# Altium PCB BEE-PC_EXP_V100.PcbDoc (part 2 of 7)
Units mm, origin at the board's own origin, x right, y up, seen from the top; angles counter-clockwise.
Board outline 180 x 79.98 mm, 6 copper layers (L1 TOP, L2 GND 1, L3 SIGNAL, L4 PWR, L5 GND 2, L6 BOT), stack 1.536 mm thick; 1146 components, 909 nets, 3933 pads, 1234 vias.
Unrouted connection lines stored in the file: 1783.
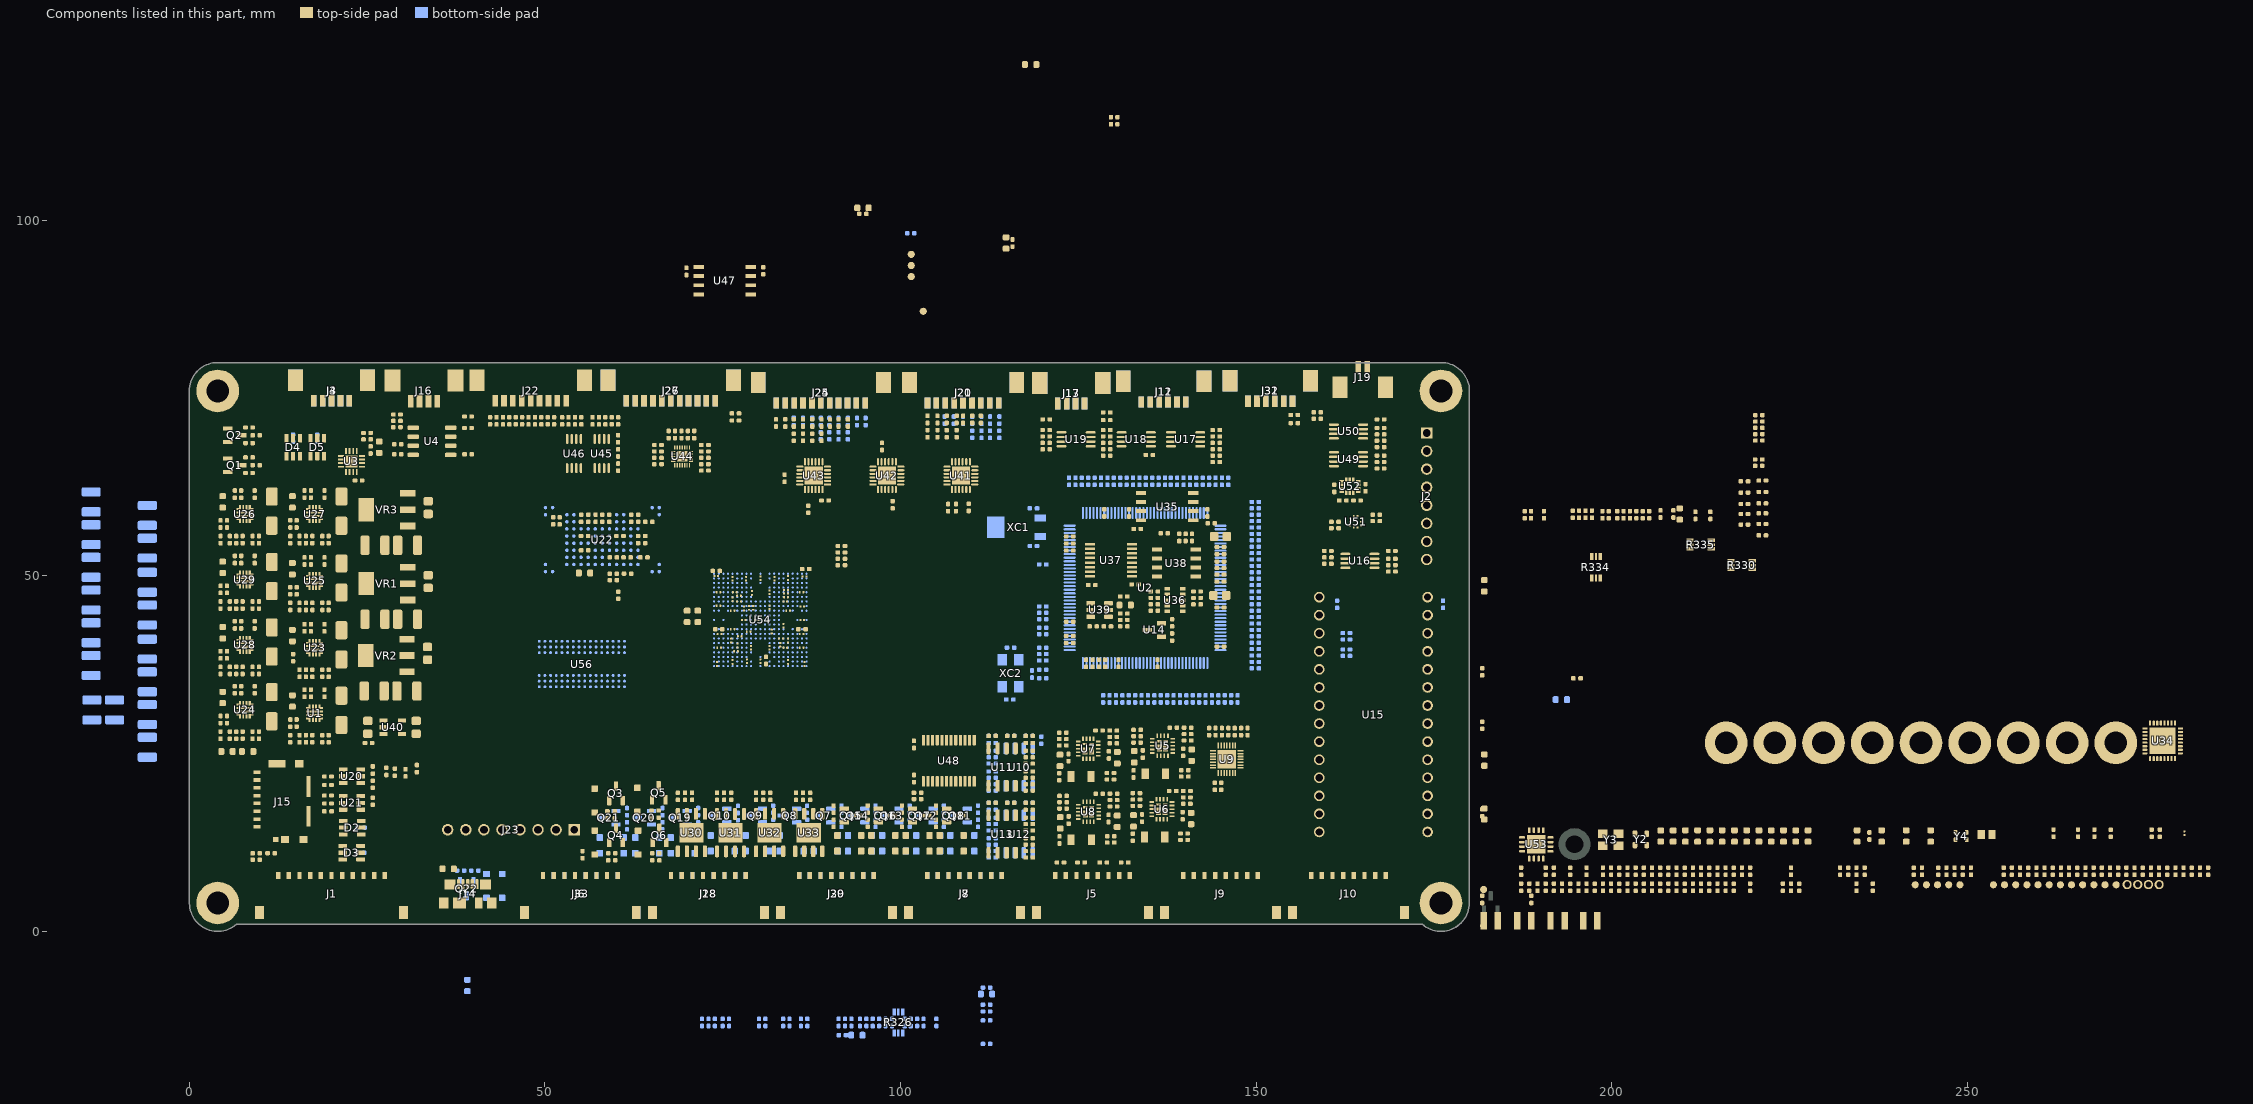
[diagram p3: the components of this part, seen from the top]

## Components (designator, comment, footprint, x,y, rotation, side; value= is the part's Value field where it differs from the comment) (continued)
R68 "22R" RES_C_1005X40 144.7,32.7 r270 bottom
R69 "22R" RES_C_1005X40 140.2,32.7 r270 bottom
R70 "22R" RES_C_1005X40 137.5,32.7 r270 bottom
R71 "22R" RES_C_1005X40 135.7,32.7 r270 bottom
R72 "22R" RES_C_1005X40 134.8,32.7 r270 bottom
R73 "22R" RES_C_1005X40 133.9,32.7 r90 bottom
R74 "22R" RES_C_1005X40 130.3,32.7 r270 bottom
R75 "22R" RES_C_1005X40 136.6,32.7 r90 bottom
R76 "22R" RES_C_1005X40 120,44.8 r180 bottom
R77 "22R" RES_C_1005X40 120,43.9 r180 bottom
R78 "22R" RES_C_1005X40 149.9,56.8 r0 bottom
R79 "10k" RES_C_1005X40 137.1,56 r180 top
R80 "10k" RES_C_1005X40 120.003,45.7 r180 bottom
R81 "22R" RES_C_1005X40 158.6,72.1 r180 top
R82 "10M" RES_C_1005X40 118.5,36.2 r270 bottom
R83 "5.62k" RES_C_1005X40 127,37.7 r270 top
R84 "10k" RES_C_1005X40 23.8,63.4 r180 top
R85 "10k" RES_C_1005X40 8.4,64.464 r0 top
R86 "10k" RES_C_1005X40 9.4,65.564 r180 top
R87 "100R" RES_C_1005X40 8.4,66.664 r0 top
R88 "10k" RES_C_1005X40 25,69.2 r0 top
R89 "10k" RES_C_1005X40 25,70.1 r0 top
R90 "10k" RES_C_1005X40 8.4,68.664 r0 top
R91 "10k" RES_C_1005X40 9.4,69.764 r180 top
R92 "100R" RES_C_1005X40 8.4,70.864 r0 top
R93 "DNP/0R" RES_C_1005X40 29.2,70.9 r180 top
R94 "DNP/0R" RES_C_1005X40 29.3,67.1 r180 top
R95 "10k" RES_C_1005X40 39.2,70.8 r0 top
R96 "10k" RES_C_1005X40 39.2,67.1 r0 top
R97 "10k" RES_C_1005X40 138.375,28.65 r180 top
R98 "10k" RES_C_1005X40 138.275,19.75 r180 top
R99 "22R" RES_C_1005X40 140.375,26.85 r180 top
R100 "22R" RES_C_1005X40 140.275,17.95 r180 top
R101 "4.7k" RES_C_1005X40 167.5,66 r180 top
R102 "4.7k" RES_C_1005X40 167.5,66.9 r180 top
R103 "10k" RES_C_1005X40 140.375,27.75 r0 top
R104 "22R" RES_C_1005X40 133.275,28.35 r180 top
R105 "10k" RES_C_1005X40 140.275,18.85 r0 top
R106 "22R" RES_C_1005X40 133.175,19.45 r180 top
R107 "10k" RES_C_1005X40 127.925,28.25 r180 top
R108 "10k" RES_C_1005X40 127.961,19.368 r180 top
R109 "22R" RES_C_1005X40 129.925,26.45 r180 top
R110 "22R" RES_C_1005X40 129.961,17.568 r180 top
R111 "10k" RES_C_1005X40 167.5,65.1 r0 top
R112 "22R" RES_C_1005X40 158.6,73 r0 top
R113 "10k" RES_C_1005X40 129.925,27.35 r0 top
R114 "22R" RES_C_1005X40 122.825,27.95 r180 top
R115 "10k" RES_C_1005X40 129.961,18.468 r0 top
R116 "22R" RES_C_1005X40 122.861,19.068 r180 top
R117 "10k" RES_C_1005X40 145.2,28.1 r90 top
R118 "10k" RES_C_1005X40 147,28.1 r90 top
R119 "10k" RES_C_1005X40 147.9,28.1 r270 top
R120 "10k" RES_C_1005X40 144.3,28.1 r270 top
R121 "10k" RES_C_1005X40 148.8,28.1 r270 top
R122 "10k" RES_C_1005X40 143.4,28.1 r270 top
R123 "22R" RES_C_1005X40 144.2,20.4 r90 top
R124 "22R" RES_C_1005X40 145.1,20.4 r90 top
R125 "120R" RES_C_1005X40 59.3,15.9 r180 top
R126 "10k" RES_C_1005X40 59.3,16.9 r180 top
R127 "120R" RES_C_1005X40 59.4,10 r180 top
R128 "10k" RES_C_1005X40 59.4,11 r180 top
R129 "120R" RES_C_1005X40 65.5,16 r180 top
R130 "10k" RES_C_1005X40 65.5,17 r180 top
R131 "120R" RES_C_1005X40 65.6,10 r180 top
R132 "10k" RES_C_1005X40 65.6,11 r180 top
R133 "22R" RES_C_1005X40 112.9,19.8 r0 bottom
R134 "22R" RES_C_1005X40 118.1,19.8 r180 top
R135 "22R" RES_C_1005X40 112.9,22.5 r180 bottom
R136 "22R" RES_C_1005X40 118.1,22.5 r0 top
R137 "10k" RES_C_1005X40 112.9,21.6 r0 bottom
R138 "10k" RES_C_1005X40 118.1,21.6 r180 top
R139 "22R" RES_C_1005X40 115.5,27.5 r180 bottom
R140 "22R" RES_C_1005X40 115.5,27.5 r0 top
R141 "22R" RES_C_1005X40 112.9,25.4 r180 bottom
R142 "22R" RES_C_1005X40 118.1,25.4 r0 top
R143 "10k" RES_C_1005X40 112.9,24.5 r0 bottom
R144 "10k" RES_C_1005X40 118.1,24.5 r180 top
R145 "22R" RES_C_1005X40 112.9,10.4 r0 bottom
R146 "22R" RES_C_1005X40 118.1,10.4 r180 top
R147 "22R" RES_C_1005X40 112.9,13.1 r180 bottom
R148 "22R" RES_C_1005X40 118.1,13.1 r0 top
R149 "10k" RES_C_1005X40 112.9,12.2 r0 bottom
R150 "10k" RES_C_1005X40 118.1,12.2 r180 top
R151 "22R" RES_C_1005X40 115.5,18.1 r180 bottom
R152 "22R" RES_C_1005X40 115.5,18.1 r0 top
R153 "22R" RES_C_1005X40 112.9,16 r180 bottom
R154 "22R" RES_C_1005X40 118.1,16 r0 top
R155 "10k" RES_C_1005X40 112.9,15.1 r0 bottom
R156 "10k" RES_C_1005X40 118.1,15.1 r180 top
R157 "22R" RES_C_1005X40 138.2,43.4 r90 top
R158 "DNP/4.7k" RES_C_1005X40 162.712,41.05 r180 bottom
R159 "DNP/4.7k" RES_C_1005X40 162.712,41.95 r180 bottom
R160 "DNP/4.7k" RES_C_1005X40 162.712,39.65 r180 bottom
R161 "DNP/4.7k" RES_C_1005X40 162.712,38.75 r180 bottom
R162 "4.7k" RES_C_1005X40 160.1,52.6 r0 top
R163 "4.7k" RES_C_1005X40 160.1,51.7 r0 top
R164 "4.7k" RES_C_1005X40 169.1,52.4 r180 top
R165 "4.7k" RES_C_1005X40 169.1,51.5 r180 top
R166 "1k" RES_C_1005X40 149.9,50.5 r180 bottom
R167 "0R" RES_C_1608X60 192.925,32.6 r0 bottom
R168 "10k" RES_C_1005X40 169.1,50.6 r0 top
R169 "22R" RES_C_1005X40 137.2,63.3 r270 bottom
R170 "4.7k" RES_C_1005X40 144.4,69.6 r180 top
R171 "4.7k" RES_C_1005X40 144.4,68.7 r180 top
R172 "4.7k" RES_C_1005X40 144.4,66.9 r180 top
R173 "4.7k" RES_C_1005X40 144.4,66 r180 top
R174 "10k" RES_C_1005X40 106.7,59.6 r90 top
R175 "10k" RES_C_1005X40 83.7,63.725 r90 top
R176 "22R" RES_C_1005X40 65.9,65.7 r180 top
R177 "22R" RES_C_1005X40 65.9,67.5 r180 top
R178 "10k" RES_C_1005X40 144.4,70.5 r0 top
R179 "22R" RES_C_1005X40 135.4,63.3 r270 bottom
R180 "4.7k" RES_C_1005X40 129,69.6 r0 top
R181 "4.7k" RES_C_1005X40 129,68.7 r0 top
R182 "10k" RES_C_1005X40 129,70.5 r180 top
R183 "4.7k" RES_C_1005X40 120.482,68.7 r0 top
R184 "4.7k" RES_C_1005X40 120.482,69.6 r0 top
R185 "22R" RES_C_1005X40 138.4,32.7 r90 bottom
R186 "22R" RES_C_1005X40 142.9,32.7 r90 bottom
R187 "22R" RES_C_1005X40 67.4,69.875 r90 top
R188 "4.7k" RES_C_1005X40 60.3,71.8 r90 top
R189 "4.7k" RES_C_1005X40 58.5,71.8 r90 top
R190 "10k" RES_C_1005X40 120.482,70.5 r180 top
R191 "DNP/10k" RES_C_1005X40 19.5,20.6 r180 top
R192 "DNP/10k" RES_C_1005X40 25.8,20.7 r90 top
R193 "DNP/10k" RES_C_1005X40 25.8,18.3 r270 top
R194 "DNP/10k" RES_C_1005X40 19.5,19.1 r180 top
R195 "DNP/10k" RES_C_1005X40 25.8,22.7 r270 top
R196 "DNP/10k" RES_C_1005X40 19.5,16.9 r180 top
R197 "10k" RES_C_1005X40 11.5,11 r0 top
R198 "10k" RES_C_1005X40 59.624,50.3 r0 top
R199 "10k" RES_C_1005X40 61.624,50.3 r180 top
R200 "10k" RES_C_1005X40 59.624,52.6 r0 top
R201 "10k" RES_C_1005X40 61.561,52.6 r180 top
R202 "10k" RES_C_1005X40 62.624,57.6 r0 top
R203 "10k" RES_C_1005X40 58.561,57.6 r180 top
R204 "10k" RES_C_1005X40 62.624,58.6 r0 top
R205 "10k" RES_C_1005X40 58.561,58.6 r180 top
R206 "10k" RES_C_1005X40 63.611,55.6 r0 top
R207 "10k" RES_C_1005X40 63.611,54.6 r0 top
R208 "10k" RES_C_1005X40 60.561,55.6 r180 top
R209 "10k" RES_C_1005X40 29.2,72.7 r180 top
R210 "10k" RES_C_1005X40 29.2,71.8 r180 top
R211 "22R" RES_C_1005X40 69.2,69.875 r90 top
R212 "22R" RES_C_1005X40 72.5,68.4 r0 top
R213 "10k" RES_C_1005X40 129.001,72.975 r0 top
R214 "10k" RES_C_1005X40 129,71.9 r0 top
R215 "22R" RES_C_1005X40 72.5,66.6 r0 top
R216 "22R" RES_C_1005X40 65.9,66.6 r180 top
R217 "470k" RES_C_1005X40 16.4,36.3 r270 top
R218 "47k" RES_C_1005X40 18.7,36.3 r270 top locked
R219 "47k" RES_C_1005X40 19.6,36.3 r270 top
R220 "470k" RES_C_1005X40 15.5,36.3 r90 top
R221 "133k" RES_C_1005X40 17.3,36.3 r90 top
R222 "470k" RES_C_1005X40 5.3,29.8 r90 top
R223 "47k" RES_C_1005X40 8.9,27.6 r270 top
R224 "47k" RES_C_1005X40 9.8,27.6 r270 top
R225 "22R" RES_C_1005X40 6.6,27.6 r270 top
R226 "1.6k" RES_C_1005X40 17.1,42.7 r270 top
R227 "DNP/10k" RES_C_1005X40 5.7,27.6 r270 top
R228 "47k" RES_C_1005X40 4.4,27.6 r270 top
R229 "10k" RES_C_1005X40 7.5,27.6 r270 top
R230 "1.6k" RES_C_1005X40 7.3,34 r270 top
R231 "470k" RES_C_1005X40 15.1,47.9 r90 top
R232 "470k" RES_C_1005X40 5.3,57.3 r90 top
R233 "47k" RES_C_1005X40 18.7,45.7 r270 top
R234 "47k" RES_C_1005X40 19.6,45.7 r270 top
R235 "47k" RES_C_1005X40 8.9,55.1 r270 top
R236 "47k" RES_C_1005X40 9.8,55.1 r270 top
R237 "22R" RES_C_1005X40 16.4,45.7 r270 top
R238 "22R" RES_C_1005X40 6.6,55.1 r270 top
R239 "DNP/10k" RES_C_1005X40 15.5,45.7 r270 top
R240 "DNP/10k" RES_C_1005X40 5.7,55.1 r270 top
R241 "133k" RES_C_1005X40 14.2,45.7 r270 top
R242 "47k" RES_C_1005X40 4.4,55.1 r270 top
R243 "10k" RES_C_1005X40 17.3,45.7 r270 top
R244 "10k" RES_C_1005X40 7.5,55.1 r270 top
R245 "1.6k" RES_C_1005X40 17.1,52.1 r270 top
R246 "1.6k" RES_C_1005X40 7.3,61.5 r270 top
R247 "470k" RES_C_1005X40 15.1,57.3 r90 top
R248 "47k" RES_C_1005X40 18.7,55.1 r270 top
R249 "47k" RES_C_1005X40 19.6,55.1 r270 top
R250 "22R" RES_C_1005X40 16.4,55.1 r270 top
R251 "DNP/10k" RES_C_1005X40 15.5,55.1 r270 top
R252 "DNP/10k" RES_C_1005X40 6.6,36.7 r270 top
R253 "470k" RES_C_1005X40 5.3,38.9 r90 top
R254 "47k" RES_C_1005X40 14.2,55.1 r270 top
R255 "10k" RES_C_1005X40 17.3,55.1 r270 top
R256 "47k" RES_C_1005X40 8.9,36.7 r270 top
R257 "47k" RES_C_1005X40 9.8,36.7 r270 top
R258 "22R" RES_C_1005X40 5.7,36.7 r270 top
R259 "10k" RES_C_1005X40 7.5,36.7 r270 top
R260 "133k" RES_C_1005X40 4.4,36.7 r270 top
R261 "1.6k" RES_C_1005X40 17.1,61.5 r270 top
R262 "1.6k" RES_C_1005X40 7.3,43.1 r270 top
R263 "DNP/10k" RES_C_1005X40 6.6,45.9 r270 top
R264 "470k" RES_C_1005X40 5.3,48.1 r90 top
R265 "47k" RES_C_1005X40 8.9,45.9 r270 top
R266 "47k" RES_C_1005X40 9.8,45.9 r270 top
R267 "22R" RES_C_1005X40 5.7,45.9 r270 top
R268 "10k" RES_C_1005X40 7.5,45.9 r270 top
R269 "133k" RES_C_1005X40 4.4,45.9 r270 top
R270 "1.6k" RES_C_1005X40 7.3,52.3 r270 top
R271 "10k" RES_C_1005X40 68.7,19 r270 top
R272 "10k" RES_C_1005X40 69.7,19 r90 top
R273 "DNP/10k" RES_C_1005X40 70.7,19 r90 top
R274 "10k" RES_C_1005X40 74.2,19 r270 top
R275 "10k" RES_C_1005X40 75.2,19 r90 top
R276 "DNP/10k" RES_C_1005X40 76.2,19 r90 top
R277 "10k" RES_C_1005X40 79.7,19 r270 top
R278 "10k" RES_C_1005X40 80.7,19 r90 top
R279 "DNP/10k" RES_C_1005X40 81.7,19 r90 top
R280 "10k" RES_C_1005X40 85.3,19 r270 top
R281 "10k" RES_C_1005X40 86.3,19 r90 top
R282 "DNP/10k" RES_C_1005X40 87.3,19 r90 top
R283 "22R" RES_C_1005X40 145.6,32.7 r90 bottom
R284 "22R" RES_C_1005X40 149.9,40.6 r180 bottom
R285 "22R" RES_C_1005X40 149.9,49.6 r180 bottom
R286 "22R" RES_C_1005X40 149.9,52.3 r180 bottom
R287 "22R" RES_C_1005X40 149.9,37 r180 bottom
R288 "22R" RES_C_1005X40 149.9,55 r180 bottom
R289 "22R" RES_C_1005X40 149.9,58.6 r180 bottom
R290 "22R" RES_C_1005X40 145.2,63.3 r270 bottom
R291 "22R" RES_C_1005X40 133.6,63.3 r270 bottom
R292 "22R" RES_C_1005X40 134.5,63.3 r270 bottom
R293 "22R" RES_C_1005X40 120,41.8 r0 bottom
R294 "22R" RES_C_1005X40 120,42.7 r0 bottom
R295 "1k" RES_C_1005X40 25.2,26.5 r180 top
R296 "0R" RES_C_1608X60 112.1,-8.8 r180 bottom
R297 "22R" RES_C_1005X40 120,38.1 r0 bottom
R298 "4.7k" RES_C_1005X40 112.1,-10.3 r180 bottom
R299 "10k" RES_C_1005X40 48.6,71.8 r270 top
R300 "10k" RES_C_1005X40 46.8,71.8 r270 top
R301 "10k" RES_C_1005X40 45,71.8 r270 top
R302 "10k" RES_C_1005X40 43.2,71.8 r270 top
R303 "4.7k" RES_C_1005X40 112.1,-11.25 r180 bottom
R304 "1k" RES_C_1005X40 199.6,58.6 r270 top
R305 "22R" RES_C_1005X40 112.1,-12.5 r180 bottom
R306 "22R" RES_C_1005X40 65.9,68.4 r180 top
R307 "22R" RES_C_1005X40 51.3,71.8 r90 top
R308 "22R" RES_C_1005X40 68.3,69.875 r90 top
R309 "22R" RES_C_1005X40 50.4,71.8 r90 top
R310 "22R" RES_C_1005X40 75.9,-12.8 r90 bottom
R311 "22R" RES_C_1005X40 49.5,71.8 r90 top
R312 "10k" RES_C_1005X40 75,-12.8 r90 bottom
R313 "22R" RES_C_1005X40 47.7,71.8 r90 top
R314 "10k" RES_C_1005X40 107.8,59.6 r90 top
R315 "22R" RES_C_1005X40 45.9,71.8 r90 top
R316 "22R" RES_C_1005X40 44.1,71.8 r90 top
R317 "22R" RES_C_1005X40 42.3,71.8 r90 top
R318 "10k" RES_C_1005X40 220.7,69.025 r180 top
R319 "10k" RES_C_1005X40 72.5,64.8 r180 top
R320 "0R" RES_C_1005X40 220.7,69.925 r180 top
R321 "22R" RES_C_1005X40 70.1,69.875 r90 top
R322 "100k" RES_C_1005X40 220.7,70.825 r180 top
R323 "10k" RES_C_1005X40 220.7,71.7 r180 top
R324 "10k" RES_C_1005X40 220.7,72.6 r180 top
R325 "22R" RES_C_1005X40 100.6,-12.8 r90 bottom
R326 "Shunt 4 Pin" RES_C_1206_SHUNT 99.7,-12.8 r90 bottom value=0.01R
R327 "22R" RES_C_1005X40 98.8,-12.8 r90 bottom
R328 "DNP/10k" RES_C_1005X40 97.9,-12.8 r90 bottom
R329 "10k" RES_C_1005X40 97,-12.8 r90 bottom
R330 "Shunt 4 Pin" RES_C_1206_SHUNT 218.275,51.5 r180 top value=0.01R
R331 "10k" RES_C_1005X40 96.1,-12.8 r90 bottom
R332 "0R" RES_C_1608X60 93.87,-14.578 r180 bottom
R333 "0R" RES_C_1608X60 209.575,58.7 r270 top
R334 "Shunt 4 Pin" RES_C_1206_SHUNT 197.8,51.2 r270 top value=0.01R
R335 "Shunt 4 Pin" RES_C_1206_SHUNT 212.5,54.4 r180 top value=0.01R
R336 "22R" RES_C_1005X40 221.2,55.7 r180 top
R337 "22R" RES_C_1005X40 218.675,57.2 r180 top
R338 "200R" RES_C_1005X40 221.2,57.3 r180 top
R339 "10k" RES_C_1005X40 205.275,58.6 r270 top
R340 "DNP/10k" RES_C_1005X40 218.675,58.7 r180 top
R341 "22R" RES_C_1005X40 204.375,58.6 r270 top
R342 "22R" RES_C_1005X40 221.2,58.8 r180 top
R343 "DNP/10k" RES_C_1005X40 203.475,58.6 r270 top
R344 "200R" RES_C_1005X40 86.9,-12.8 r90 bottom
R345 "22R" RES_C_1005X40 218.675,60.1 r180 top
R346 "22R" RES_C_1005X40 202.575,58.6 r270 top
R347 "200R" RES_C_1005X40 86,-12.8 r90 bottom
R348 "16.9k" RES_C_1005X40 221.2,60.2 r180 top
R349 "22R" RES_C_1005X40 201.675,58.6 r270 top
R350 "20k" RES_C_1005X40 218.675,61.7 r180 top
R351 "22R" RES_C_1005X40 200.775,58.6 r270 top
R352 "20k" RES_C_1005X40 221.2,61.8 r180 top
R353 "22R" RES_C_1005X40 84.4,-12.8 r90 bottom
R354 "16.9k" RES_C_1005X40 218.675,63.3 r180 top
R355 "22R" RES_C_1005X40 83.5,-12.8 r90 bottom
R356 "22R" RES_C_1005X40 221.2,63.4 r180 top
R357 "22R" RES_C_1005X40 81,-12.8 r90 bottom
R358 "4.02k" RES_C_1005X40 198.7,58.6 r270 top
R359 "51R" RES_C_1005X40 80.1,-12.8 r90 bottom
R360 "0R" RES_C_1005X40 195.425,58.672 r270 top
R361 "1M" RES_C_1005X40 194.525,58.672 r270 top
R362 "DNP/0R" RES_C_1005X40 60.324,47.275 r270 top
R363 "DNP/0R" RES_C_1005X40 105.05,-12.8 r90 bottom
R364 "0R" RES_C_1608X60 70,44.3 r90 top
R365 "10k" RES_C_1005X40 110.1,69.9 r90 bottom
R366 "10k" RES_C_1005X40 111.4,69.9 r90 bottom
R367 "10k" RES_C_1005X40 112.6,69.9 r90 bottom
R368 "10k" RES_C_1005X40 113.9,69.9 r90 bottom
R369 "DNP/0R" RES_C_1005X40 190.475,58.6 r270 top
R370 "DNP/0R" RES_C_1608X60 71.5,44.3 r270 top
R371 "22R" RES_C_1005X40 188.675,58.6 r270 top
R372 "22R" RES_C_1005X40 72.1,-12.8 r90 bottom
R373 "22R" RES_C_1005X40 187.775,58.6 r270 top
R374 "22R" RES_C_1005X40 94.3,-12.8 r270 bottom
R375 "22R" RES_C_1005X40 95.2,-12.8 r90 bottom
R376 "22R" RES_C_1005X40 91.832,-14.583 r180 bottom
R377 "22R" RES_C_1005X40 93.1,-12.8 r90 bottom
R378 "22R" RES_C_1005X40 115.75,96.8 r90 top
R379 "22R" RES_C_1005X40 195.125,35.6 r180 top
R380 "22R" RES_C_1005X40 91.3,-12.8 r270 bottom
R381 "22R" RES_C_1005X40 92.2,-12.8 r90 bottom
R382 "22R" RES_C_1005X40 220.675,66.367 r0 top
R383 "22R" RES_C_1005X40 220.675,65.467 r180 top
R384 "22R" RES_C_1005X40 91.7,52.4 r0 top
R385 "22R" RES_C_1005X40 91.7,51.5 r180 top
R386 "22R" RES_C_1005X40 91.7,53.3 r0 top
R387 "22R" RES_C_1005X40 91.7,54.2 r180 top
R388 "4.7k" RES_C_1005X40 143.7,57.4 r0 top
R389 "4.7k" RES_C_1005X40 135.7,46.9 r180 top
R390 "4.7k" RES_C_1005X40 141.7,46 r0 top
R391 "4.7k" RES_C_1005X40 135.7,46 r180 top
R392 "4.7k" RES_C_1005X40 135.7,45.1 r180 top
R393 "4.7k" RES_C_1005X40 141.7,47.8 r0 top
R394 "1k" RES_C_1005X40 131.4,42.9 r180 top
R395 "4.7k" RES_C_1005X40 140.1,55.4 r90 top
R396 "4.7k" RES_C_1005X40 139.2,55.4 r90 top
R397 "4.7k" RES_C_1005X40 126.9,48.7 r180 top
R398 "10k" RES_C_1005X40 127.1,42.9 r180 top
R399 "4.7k" RES_C_1005X40 133,48.8 r0 top
R400 "22R" RES_C_1005X40 129.1,42.9 r180 top
R401 "16.5k/1%" RES_C_1005X40 131.4,44.7 r180 top
R402 "16.5k/1%" RES_C_1005X40 131.4,47.1 r180 top
R403 "10k" RES_C_1005X40 107.9,70 r90 top
R404 "22R" RES_C_1005X40 112.1,-7.9 r180 bottom
R405 "10k" RES_C_1005X40 106.5,70 r90 top
R406 "10k" RES_C_1005X40 105.2,70 r90 top
R407 "10k" RES_C_1005X40 103.8,70 r90 top
R408 "22R" RES_C_1005X40 106.2,71.9 r90 bottom
R409 "22R" RES_C_1005X40 111.3,72 r90 top
R410 "22R" RES_C_1005X40 107.5,71.9 r90 bottom
R411 "22R" RES_C_1005X40 110.1,72 r90 top
R412 "22R" RES_C_1005X40 108.8,71.9 r90 bottom
R413 "22R" RES_C_1005X40 108.8,72 r90 top
R414 "22R" RES_C_1005X40 110.1,71.9 r90 bottom
R415 "22R" RES_C_1005X40 107.9,72 r90 top
R416 "22R" RES_C_1005X40 111.4,71.9 r90 bottom
R417 "22R" RES_C_1005X40 106.5,72 r90 top
R418 "22R" RES_C_1005X40 112.6,71.9 r90 bottom
R419 "22R" RES_C_1005X40 105.2,72 r90 top
R420 "22R" RES_C_1005X40 113.9,71.9 r90 bottom
R421 "22R" RES_C_1005X40 103.8,72 r90 top
R422 "10k" RES_C_1005X40 97.4,68.2 r270 top
R423 "10k" RES_C_1005X40 88.9,69.5 r90 top
R424 "10k" RES_C_1005X40 87.6,69.5 r90 top
R425 "10k" RES_C_1005X40 86.3,69.5 r90 top
R426 "10k" RES_C_1005X40 85,69.5 r90 top
R427 "10k" RES_C_1005X40 88.8,69.7 r90 bottom
R428 "10k" RES_C_1005X40 90,69.7 r90 bottom
R429 "10k" RES_C_1005X40 91.3,69.7 r90 bottom
R430 "10k" RES_C_1005X40 92.6,69.7 r90 bottom
R431 "22R" RES_C_1005X40 92.6,71.5 r90 top
R432 "22R" RES_C_1005X40 85,71.7 r90 bottom
R433 "DNP/22R" RES_C_1005X40 91.3,71.5 r90 top
R434 "DNP/22R" RES_C_1005X40 86.3,71.7 r90 bottom
R435 "22R" RES_C_1005X40 90.1,71.5 r90 top
R436 "22R" RES_C_1005X40 87.6,71.7 r90 bottom
R437 "22R" RES_C_1005X40 88.9,71.5 r90 top
R438 "22R" RES_C_1005X40 88.8,71.7 r90 bottom
R439 "22R" RES_C_1005X40 87.6,71.5 r90 top
R440 "22R" RES_C_1005X40 90,71.7 r90 bottom
R441 "22R" RES_C_1005X40 86.3,71.5 r90 top
R442 "22R" RES_C_1005X40 91.3,71.7 r90 bottom
R443 "22R" RES_C_1005X40 85,71.5 r90 top
R444 "22R" RES_C_1005X40 92.6,71.7 r90 bottom
R445 "22R" RES_C_1005X40 83.8,71.5 r90 top
R446 "22R" RES_C_1005X40 93.9,71.7 r90 bottom
R447 "22R" RES_C_1005X40 82.5,71.5 r90 top
R448 "22R" RES_C_1005X40 95.1,71.7 r90 bottom
R449 "10k" RES_C_1005X40 87.025,59.372 r90 top
R450 "22R" RES_C_1005X40 72.5,67.5 r0 top
R451 "22R" RES_C_1005X40 72.5,65.7 r0 top
R452 "4.7k" RES_C_1005X40 76.8,71.85 r180 top
R453 "4.7k" RES_C_1005X40 76.8,72.85 r180 top
R454 "22R" RES_C_1005X40 103.25,-12.8 r90 bottom
R455 "22R" RES_C_1005X40 101.441,98.177 r180 bottom
R456 "22R" RES_C_1005X40 102.35,-12.8 r90 bottom
R457 "22R" RES_C_1005X40 101.45,-12.8 r90 bottom
R458 "4.7k" RES_C_1005X40 60.295,65.291 r90 top
R459 "4.7k" RES_C_1005X40 60.295,67.291 r270 top
R460 "22R" RES_C_1005X40 57.6,71.8 r90 top
R461 "22R" RES_C_1005X40 59.4,71.8 r90 top
R462 "22R" RES_C_1005X40 197.225,58.672 r270 top
R463 "22R" RES_C_1005X40 73.9,-12.8 r90 bottom
R464 "22R" RES_C_1005X40 73,-12.8 r90 bottom
R465 "22R" RES_C_1005X40 129.6,114 r270 top
R466 "10k" RES_C_1005X40 60.295,69.291 r270 top
R467 "22R" RES_C_1005X40 130.5,114 r90 top
R468 "22R" RES_C_1005X40 94.7,100.9 r0 top
R469 "4.7k" RES_C_1005X40 69.9,92.8 r270 top
R470 "22R" RES_C_1005X40 213.875,58.5 r270 top
R471 "22R" RES_C_1005X40 53.327,71.8 r90 top
R472 "22R" RES_C_1005X40 54.227,71.8 r90 top
R473 "10k" RES_C_1005X40 55.127,71.8 r90 top
R474 "22R" RES_C_1005X40 211.775,58.5 r270 top
R475 "22R" RES_C_1005X40 208.675,58.7 r270 top
R476 "DNP/10k" RES_C_1005X40 206.875,58.7 r270 top
R477 "DNP/10k" RES_C_1005X40 112.1,-15.8 r180 bottom
R478 "22R" RES_C_1005X40 196.325,58.672 r270 top
R479 "4.7k" RES_C_1005X40 91.7,17.2 r90 bottom
R480 "4.7k" RES_C_1005X40 86.864,17.164 r90 bottom
R481 "4.7k" RES_C_1005X40 82.1,17.2 r90 bottom
R482 "4.7k" RES_C_1005X40 77.15,17.15 r90 bottom
R483 "10k" RES_C_1005X40 91.7,15.2 r90 bottom
R484 "10k" RES_C_1005X40 86.9,15.2 r90 bottom
R485 "10k" RES_C_1005X40 82.1,15.2 r90 bottom
R486 "10k" RES_C_1005X40 77.15,15.15 r90 bottom
R487 "4.7k" RES_C_1005X40 110.9,17.2 r90 bottom
R488 "4.7k" RES_C_1005X40 106.1,17.2 r90 bottom
R489 "4.7k" RES_C_1005X40 101.3,17.2 r90 bottom
R490 "4.7k" RES_C_1005X40 96.5,17.2 r90 bottom
R491 "10k" RES_C_1005X40 110.9,15.2 r90 bottom
R492 "10k" RES_C_1005X40 106.1,15.2 r90 bottom
R493 "10k" RES_C_1005X40 101.3,15.2 r90 bottom
R494 "10k" RES_C_1005X40 96.5,15.2 r90 bottom
R495 "4.7k" RES_C_1005X40 90.6,17.2 r90 top
R496 "4.7k" RES_C_1005X40 95.4,17.2 r90 top
R497 "4.7k" RES_C_1005X40 100.2,17.2 r90 top
R498 "4.7k" RES_C_1005X40 105,17.2 r90 top
R499 "10k" RES_C_1005X40 90.6,15.2 r90 top
R500 "10k" RES_C_1005X40 95.4,15.2 r90 top
R501 "10k" RES_C_1005X40 100.2,15.2 r90 top
R502 "10k" RES_C_1005X40 105,15.2 r90 top
R503 "4.7k" RES_C_1005X40 102.4,19.5 r0 top
R504 "4.7k" RES_C_1005X40 102.4,18.6 r0 top
R505 "4.7k" RES_C_1005X40 167.5,69.9 r180 top
R506 "4.7k" RES_C_1005X40 167.5,70.8 r180 top
R507 "10k" RES_C_1005X40 167.5,69 r0 top
R508 "4.7k" RES_C_1005X40 71.55,16.85 r90 bottom
R509 "4.7k" RES_C_1005X40 66.55,16.85 r90 bottom
R510 "4.7k" RES_C_1005X40 61.55,16.85 r90 bottom
R511 "4.7k" RES_C_1005X40 38.15,8.55 r180 bottom
R512 "10k" RES_C_1005X40 71.55,14.85 r90 bottom
R513 "10k" RES_C_1005X40 66.55,14.85 r90 bottom
R514 "10k" RES_C_1005X40 61.55,14.85 r90 bottom
R515 "10k" RES_C_1005X40 40.15,8.55 r180 bottom
R516 "4.7k" RES_C_1005X40 161.1,56.7 r0 top
R517 "DNP/4.7k" RES_C_1005X40 161.1,57.6 r0 top
R518 "4.7k" RES_C_1005X40 165.4,62.4 r90 top
R519 "4.7k" RES_C_1005X40 161,62.3 r90 top
R520 "22R" RES_C_1005X40 203.375,8.471 r90 top
R521 "22R" RES_C_1005X40 199.925,8.471 r90 top
R522 "22R" RES_C_1005X40 198.775,8.471 r90 top
R523 "22R" RES_C_1005X40 209.125,8.471 r90 top
R524 "22R" RES_C_1005X40 217.175,8.471 r90 top
R525 "22R" RES_C_1005X40 212.575,8.471 r90 top
R526 "22R" RES_C_1005X40 213.725,8.471 r90 top
R527 "22R" RES_C_1005X40 210.275,8.471 r90 top
R528 "22R" RES_C_1005X40 211.425,8.471 r90 top
R529 "4.7k" RES_C_1005X40 181.799,16.7 r90 top
R530 "4.7k" RES_C_1005X40 214.875,8.471 r90 top
R531 "4.7k" RES_C_1005X40 218.325,8.471 r90 top
R532 "4.7k" RES_C_1005X40 219.475,8.471 r90 top
R533 "4.7k" RES_C_1005X40 216.025,8.471 r90 top
R534 "DNP/4.7k" RES_C_1005X40 181.799,29 r90 top
R535 "DNP/10k" RES_C_1005X40 224.075,6.221 r90 top
R536 "DNP/10k" RES_C_1005X40 225.225,6.221 r90 top
R537 "22R" RES_C_1005X40 259.725,8.471 r90 top
R538 "22R" RES_C_1005X40 260.875,8.471 r90 top
R539 "22R" RES_C_1005X40 258.575,8.471 r90 top
R540 "22R" RES_C_1005X40 256.275,8.471 r90 top
R541 "22R" RES_C_1005X40 257.425,8.471 r90 top
R542 "DNP/10k" RES_C_1005X40 265.475,8.471 r90 top
R543 "DNP/10k" RES_C_1005X40 266.625,8.471 r90 top
R544 "22R" RES_C_1005X40 264.325,8.471 r90 top
R545 "22R" RES_C_1005X40 262.025,8.471 r90 top
R546 "DNP/10k" RES_C_1005X40 263.175,8.471 r90 top
R547 "DNP/10k" RES_C_1005X40 255.125,8.471 r90 top
R548 "DNP/10k" RES_C_1005X40 247.075,8.471 r90 top
R549 "DNP/10k" RES_C_1005X40 248.225,8.471 r90 top
R550 "DNP/10k" RES_C_1005X40 245.925,8.471 r90 top
R551 "DNP/10k" RES_C_1005X40 243.625,8.471 r90 top
R552 "22R" RES_C_1005X40 30.4,22.3 r90 top
R553 "22R" RES_C_1005X40 32,22.9 r90 top
R554 "22R" RES_C_1005X40 27.7,22.5 r90 top
R555 "22R" RES_C_1005X40 28.9,22.4 r90 top
R556 "22R" RES_C_1005X40 249.375,8.471 r90 top
R557 "22R" RES_C_1005X40 250.525,8.471 r90 top
R558 "22R" RES_C_1005X40 283.875,8.471 r90 top
R559 "22R" RES_C_1005X40 187.275,6.221 r90 top
R560 "22R" RES_C_1005X40 282.725,8.471 r90 top
R561 "22R" RES_C_1005X40 280.425,8.471 r90 top
R562 "22R" RES_C_1005X40 281.575,8.471 r90 top
R563 "22R" RES_C_1005X40 191.875,6.221 r90 top
R564 "22R" RES_C_1005X40 193.025,6.221 r90 top
R565 "22R" RES_C_1005X40 190.725,6.221 r90 top
R566 "22R" RES_C_1005X40 188.425,6.221 r90 top
R567 "22R" RES_C_1005X40 189.575,6.221 r90 top
R568 "22R" RES_C_1005X40 279.275,8.471 r90 top
R569 "DNP/100k" RES_C_1005X40 271.225,8.471 r90 top
R570 "10k" RES_C_1005X40 272.375,8.471 r90 top
R571 "10k" RES_C_1005X40 270.075,8.471 r90 top
R572 "10k" RES_C_1005X40 267.775,8.471 r90 top
R573 "240R" RES_C_1005X40 268.925,8.471 r90 top
R574 "100k" RES_C_1005X40 276.975,8.471 r90 top
R575 "240R" RES_C_1005X40 278.125,8.471 r90 top
R576 "1k" RES_C_1005X40 275.825,8.471 r90 top
R577 "1k" RES_C_1005X40 181.799,4.5 r90 top
R578 "1k" RES_C_1005X40 273.525,8.471 r90 top
R579 "1k" RES_C_1005X40 274.675,8.471 r90 top
R580 "1M" RES_C_1005X40 188.699,4.5 r90 top
R581 "100R" RES_C_1005X40 181.799,4.5 r90 top
TP1 "" Testpoint_TH_D130H80 275.48,6.596 r90 top
TP2 "" Testpoint_TH_D130H80 276.98,6.596 r90 top
TP3 "" Testpoint_TH_D130H80 272.48,6.596 r90 top
TP4 "" Testpoint_TH_D130H80 273.98,6.596 r90 top
TP5 "Test Point No BOM" TP_1mm_SMD 103.2,87.2 r180 top value="TP PAD PCB 1mm"
TP6 "Test Point No BOM" TP_1mm_SMD 101.516,95.211 r180 top value="TP PAD PCB 1mm"
TP7 "Test Point No BOM" TP_1mm_SMD 101.516,93.644 r180 top value="TP PAD PCB 1mm"
TP8 "Test Point No BOM" TP_1mm_SMD 101.516,92.077 r180 top value="TP PAD PCB 1mm"
TP9 "Test Point No BOM" TP_1mm_SMD 247.395,6.561 r90 top value="TP PAD PCB 1mm"
TP10 "Test Point No BOM" TP_1mm_SMD 242.685,6.561 r90 top value="TP PAD PCB 1mm"
TP11 "Test Point No BOM" TP_1mm_SMD 244.255,6.561 r90 top value="TP PAD PCB 1mm"
TP12 "Test Point No BOM" TP_1mm_SMD 248.965,6.561 r90 top value="TP PAD PCB 1mm"
TP13 "Test Point No BOM" TP_1mm_SMD 253.675,6.561 r90 top value="TP PAD PCB 1mm"
TP14 "Test Point No BOM" TP_1mm_SMD 255.245,6.561 r90 top value="TP PAD PCB 1mm"
TP15 "Test Point No BOM" TP_1mm_SMD 181.999,5.9 r90 top value="TP PAD PCB 1mm"
TP18 "Test Point No BOM" TP_1mm_SMD 181.999,0.8 r90 top value="TP PAD PCB 1mm"
TP20 "Test Point No BOM" TP_1mm_SMD 263.095,6.561 r90 top value="TP PAD PCB 1mm"
TP22 "Test Point No BOM" TP_1mm_SMD 264.665,6.561 r90 top value="TP PAD PCB 1mm"
TP25 "Test Point No BOM" TP_1mm_SMD 266.235,6.561 r90 top value="TP PAD PCB 1mm"
TP26 "Test Point No BOM" TP_1mm_SMD 258.385,6.561 r90 top value="TP PAD PCB 1mm"
TP27 "Test Point No BOM" TP_1mm_SMD 259.955,6.561 r90 top value="TP PAD PCB 1mm"
TP28 "Test Point No BOM" TP_1mm_SMD 261.525,6.561 r90 top value="TP PAD PCB 1mm"
TP29 "Test Point No BOM" TP_1mm_SMD 267.805,6.561 r90 top value="TP PAD PCB 1mm"
TP30 "Test Point No BOM" TP_1mm_SMD 270.945,6.561 r90 top value="TP PAD PCB 1mm"
TP31 "Test Point No BOM" TP_1mm_SMD 181.999,0.8 r90 top value="TP PAD PCB 1mm"
TP32 "Test Point No BOM" TP_1mm_SMD 269.375,6.561 r90 top value="TP PAD PCB 1mm"
TP33 "Test Point No BOM" TP_1mm_SMD 256.815,6.561 r90 top value="TP PAD PCB 1mm"
TP34 "Test Point No BOM" TP_1mm_SMD 245.825,6.561 r90 top value="TP PAD PCB 1mm"
U1 "TPS259470ARPWR" VQFN-HR-10 17.6,30.7 r90 top
U2 "SAMV71Q21B" AP6-00118 134.4,48.3 r0 bottom locked
U3 "FSUSB74MPX" QFN50P300X300X80-17N 22.8,66.1 r180 top
U4 "IC_PWRSW_MIC2026-1YM" SOIC127P602X173-8N 34.125,68.921 r180 top
U5 "LT8722AV#PBF" QFN18 136.85,26.1 r270 top
U6 "LT8722AV#PBF" QFN18 136.75,17.2 r270 top
U7 "LT8722AV#PBF" QFN18 126.4,25.7 r270 top
U8 "LT8722AV#PBF" QFN18 126.436,16.818 r270 top
U9 "MAX14662ETI+T" QFN40P400X400X80-29N 145.9,24.2 r0 top
U10 "OPA2340UA" SOIC127P602X173-8N 116.7,23.1 r90 bottom
U11 "OPA2340UA" SOIC127P602X173-8N 114.3,23.1 r90 top
U12 "OPA2340UA" SOIC127P602X173-8N 116.7,13.7 r90 bottom
U13 "OPA2340UA" SOIC127P602X173-8N 114.3,13.7 r90 top
U14 "TC1047AVNBTR" SOT95P240X120-3N 135.7,42.4 r180 top
U15 "mp-HighDriver4" MP_HIGHDRIVER4 166.5,30.5 r270 top locked
U16 "PCA9508DP,118" TSOP8 164.6,52.1 r0 top
U17 "PCA9508DP,118" TSOP8 140.1,69.2 r180 top
U18 "PCA9508DP,118" TSOP8 133.152,69.2 r180 top
U19 "PCA9508DP,118" TSOP8 124.7,69.2 r180 top
U20 "IP4220CZ6" SOT95P280X145-6N 22.879,21.825 r180 top
U21 "IP4220CZ6" SOT95P280X145-6N 22.879,18.075 r180 top
U22 "MTFC32GAZAQDW-AAT" BGA_100_C_100P_10X17_1400X1800X150 58.086,55.1 r270 bottom
U23 "TPS259470ARPWR" VQFN-HR-10 17.6,39.9 r90 top
U24 "TPS259470ARPWR" VQFN-HR-10 7.8,31.2 r90 top
U25 "TPS259470ARPWR" VQFN-HR-10 17.6,49.3 r90 top
U26 "TPS259470ARPWR" VQFN-HR-10 7.8,58.7 r90 top
U27 "TPS259470ARPWR" VQFN-HR-10 17.6,58.7 r90 top
U28 "TPS259470ARPWR" VQFN-HR-10 7.8,40.3 r90 top
U29 "TPS259470ARPWR" VQFN-HR-10 7.8,49.5 r90 top
U30 "TB67H451AFNG,EL" SOIC127P602X173-8N_EPAD 70.6,13.9 r270 top
U31 "TB67H451AFNG,EL" SOIC127P602X173-8N_EPAD 76.1,13.888 r270 top
U32 "TB67H451AFNG,EL" SOIC127P602X173-8N_EPAD 81.6,13.9 r270 top
U33 "TB67H451AFNG,EL" SOIC127P602X173-8N_EPAD 87.1,13.9 r270 top
U34 "MCP16502TAB-E/S8B" QFN-32_5X5_EP3.7X3.7 277.47,26.796 r0 top
U35 "AS3004204-0108X0PSAY" SOIC127P790X216-8 137.479,59.725 r180 top
U36 "RV-3129-C3-32.768KHZ-OPTION-A-TB-QA" IC_RV-3129-C3_32.768KHZ_OPTION_A_TB_QA 138.6,46.6 r0 top
U37 "SN3257QPWRQ1" SOIC_PRQ1_TEX 129.6,52.2 r180 top
U38 "IS66WVS8M8FBLL-104NLI" SOIC8_150MIL_N_ISI 138.8,51.8 r0 top
U39 "TPL5010QDDCTQ1" SOT95P280X145-6N 128,45.2 r180 top
U40 "TLV75518PDBVR" SOT25 28.6,28.7 r0 top
U41 "TS3A27518EIRTWRQ1" FP-RTW0024B-IPC_A 108.5,64.1 r90 top
U42 "TS3A27518EIRTWRQ1" FP-RTW0024B-IPC_A 98.1,64.1 r90 top
U43 "TS3A27518EIRTWRQ1" FP-RTW0024B-IPC_A 87.8,64.1 r90 top
U44 "PI3WVR626XEBEX" PI3WVR626XEBEX_DIO 69.3,66.8 r0 top
U45 "PCA9508DP,118" TSOP8 58,67.2 r90 top
U46 "PCA9508DP,118" TSOP8 54.1,67.2 r90 top
U47 "AS3004204-0108X0PSAY" SOIC127P790X216-8 75.3,91.5 r0 top
U48 "TCA6416APWR" SOP65P440W-24N 106.8,24 r90 top
U49 "PCA9508DP,118" TSOP8 163,66.4 r0 top
U50 "PCA9508DP,118" TSOP8 163,70.3 r0 top
U51 "BMP390" 10LGA_2X2X0p75_BOS 164,57.6 r270 top
U52 "LSM6DSOXTR" PQFN50P250X300X86-14N 163.19,62.583 r0 top
U53 "PAC1934 UQFN-16" UQFN-16_4X4_EP2.6X2.6 189.4,12.246 r0 top value=PAC1934
U54 "SAMA7G54" TFBGA-343_14x14 80.3,43.8 r90 bottom locked
U56 "IS43TR16512BL-125KBLI" TWBGA96_ISI 55.2,37.6 r270 bottom
VR1 "LM1117MP-3.3/NOPB" VREG_LM1117MP-3.3/NOPB 27.8,48.9 r180 top
VR2 "LM1117MP-3.3/NOPB" VREG_LM1117MP-3.3/NOPB 27.7,38.8 r180 top
VR3 "LM1117MP-3.3/NOPB" VREG_LM1117MP-3.3/NOPB 27.8,59.3 r180 top
XC1 "Farnell order no:1539364" AP7-00044 119.654,56.854 r270 bottom value="32.768kHz +/-20PPM 7pF  SMD"
XC2 "" AP7-00039 115.475,36.3 r270 bottom value=12.00MHz
Y1 "Crystal 2 Pins" CRYSTAL_NX2012SA 252.73,13.653 r0 top value=32.768kHz
Y2 "DSC10xx DFN-4" DFN-4_2.5x2 204.102,12.946 r0 top value=24MHz
Y3 "Crystal 4 Pins" CRYSTAL_ABM8G 199.851,12.895 r0 top value=24MHz
Y4 "DSC60xx DFN-4_LGA-4" DFN-4_2x1.6 249.127,13.421 r0 top value=32.768KHz

## Footprints (in the part's own frame and the unit in brackets; to place one, negate y for a bottom-side part, rotate by r counter-clockwise, add the part's x,y. Pads: shape width x height; smd on the part's side, far side on the other; paste and mask are expansions set on the pad)
10LGA_2X2X0p75_BOS [mil]
  rect 11x10 smd paste+0 mask+0: 1(-31,9.84) 2(-31,-9.84) 6(31,-9.84) 7(31,9.84)
  rect 10x11 smd paste+0 mask+0: 3(-19.68,-31) 4(0,-31) 5(19.69,-31) 8(19.69,31) 9(0,31) 10(-19.68,31)
  silkscreen extent -56,-46 46,46, body extent -41,-41 41,41, height 32
47346-0001_MOL [mm]
  rrect50% 0.457x1.372 smd: 1(-1.3,2.58) 2(-0.65,2.58) 3(0,2.58) 4(0.65,2.58) 5(1.3,2.58)
  rect 1.3x1.6 smd paste-0.1: 6(-3.375,-0.08) 6(3.375,-0.08)
  rect 1.549x1.422 smd paste-0.1: 6(-2.488,2.495) 6(2.488,2.495)
  rect 1.8x1.6 smd paste-0.1: 6(-1.15,-0.08)
  rect 1x1.6 smd paste-0.1: 6(1.549,-0.08)
  silkscreen extent -3.95,1.08 2.97,3.05, body extent -3.99,-2.78 3.99,2.65, height 2.69
AP6-00118 [mm]
  oval 1.7x0.3 smd: 1(-10.6,8.75) 2(-10.6,8.25) 3(-10.6,7.75) 4(-10.6,7.25) 5(-10.6,6.75) 6(-10.6,6.25) 7(-10.6,5.75) 8(-10.6,5.25) 9(-10.6,4.75) 10(-10.6,4.25) 11(-10.6,3.75) 12(-10.6,3.25) 13(-10.6,2.75) 14(-10.6,2.25) 15(-10.6,1.75) 16(-10.6,1.25) 17(-10.6,0.75) 18(-10.6,0.25) 19(-10.6,-0.25) 20(-10.6,-0.75) 21(-10.6,-1.25) 22(-10.6,-1.75) 23(-10.6,-2.25) 24(-10.6,-2.75) 25(-10.6,-3.25) 26(-10.6,-3.75) 27(-10.6,-4.25) 28(-10.6,-4.75) 29(-10.6,-5.25) 30(-10.6,-5.75) 31(-10.6,-6.25) 32(-10.6,-6.75) 33(-10.6,-7.25) 34(-10.6,-7.75) 35(-10.6,-8.25) 36(-10.6,-8.75) 73(10.6,-8.75) 74(10.6,-8.25) 75(10.6,-7.75) 76(10.6,-7.25) 77(10.6,-6.75) 78(10.6,-6.25) 79(10.6,-5.75) 80(10.6,-5.25) 81(10.6,-4.75) 82(10.6,-4.25) 83(10.6,-3.75) 84(10.6,-3.25) 85(10.6,-2.75) 86(10.6,-2.25) 87(10.6,-1.75) 88(10.6,-1.25) 89(10.6,-0.75) 90(10.6,-0.25) 91(10.6,0.25) 92(10.6,0.75) 93(10.6,1.25) 94(10.6,1.75) 95(10.6,2.25) 96(10.6,2.75) 97(10.6,3.25) 98(10.6,3.75) 99(10.6,4.25) 100(10.6,4.75) 101(10.6,5.25) 102(10.6,5.75) 103(10.6,6.25) 104(10.6,6.75) 105(10.6,7.25) 106(10.6,7.75) 107(10.6,8.25) 108(10.6,8.75)
  oval 0.3x1.7 smd: 37(-8.75,-10.55) 38(-8.25,-10.55) 39(-7.75,-10.55) 40(-7.25,-10.55) 41(-6.75,-10.55) 42(-6.25,-10.55) 43(-5.75,-10.55) 44(-5.25,-10.55) 45(-4.75,-10.55) 46(-4.25,-10.55) 47(-3.75,-10.55) 48(-3.25,-10.55) 49(-2.75,-10.55) 50(-2.25,-10.55) 51(-1.75,-10.55) 52(-1.25,-10.55) 53(-0.75,-10.55) 54(-0.25,-10.55) 55(0.25,-10.55) 56(0.75,-10.55) 57(1.25,-10.55) 58(1.75,-10.55) 59(2.25,-10.55) 60(2.75,-10.55) 61(3.25,-10.55) 62(3.75,-10.55) 63(4.25,-10.55) 64(4.75,-10.55) 65(5.25,-10.55) 66(5.75,-10.55) 67(6.25,-10.55) 68(6.75,-10.55) 69(7.25,-10.55) 70(7.75,-10.55) 71(8.25,-10.55) 72(8.75,-10.55) 109(8.75,10.55) 110(8.25,10.55) 111(7.75,10.55) 112(7.25,10.55) 113(6.75,10.55) 114(6.25,10.55) 115(5.75,10.55) 116(5.25,10.55) 117(4.75,10.55) 118(4.25,10.55) 119(3.75,10.55) 120(3.25,10.55) 121(2.75,10.55) 122(2.25,10.55) 123(1.75,10.55) 124(1.25,10.55) 125(0.75,10.55) 126(0.25,10.55) 127(-0.25,10.55) 128(-0.75,10.55) 129(-1.25,10.55) 130(-1.75,10.55) 131(-2.25,10.55) 132(-2.75,10.55) 133(-3.25,10.55) 134(-3.75,10.55) 135(-4.25,10.55) 136(-4.75,10.55) 137(-5.25,10.55) 138(-5.75,10.55) 139(-6.25,10.55) 140(-6.75,10.55) 141(-7.25,10.55) 142(-7.75,10.55) 143(-8.25,10.55) 144(-8.75,10.55)
  silkscreen extent -12.5,-12.5 12.5,12.5, body extent -11,-11 11,11, height 1.71
AP7-00039 [mm] "FOX FQ5032B"
  rect 1.6x1.3 smd: 1(-1.9,-1.15) 2(1.9,-1.15) 3(1.9,1.15) 4(-1.9,1.15)
  silkscreen extent -3,-2.1 3,2.1, body extent -2.5,-1.6 2.5,1.6, height 1
AP7-00044 [mm]
  rect 1x1.6 smd: 1(-1.3,0) 2(1.3,0)
  rect 3x2.5 smd: 3(0,6.25)
  silkscreen extent -2,-1 2,7.7, body extent -1.5,-0.7 1.5,7.4, height 2.08
BGA_100_C_100P_10X17_1400X1800X150 [mm] "BGA, 100-Leads, Body 14.00x18.00mmx1.50mm, Pitch 1.00mm"
  round 0.49 smd: A1(-4.5,8) A2(-3.5,8) A9(3.5,8) A10(4.5,8) B1(-4.5,7) B10(4.5,7) D2(-3.5,5) D3(-2.5,5) D4(-1.5,5) D5(-0.5,5) D6(0.5,5) D7(1.5,5) D8(2.5,5) D9(3.5,5) E2(-3.5,4) E3(-2.5,4) E4(-1.5,4) E5(-0.5,4) E6(0.5,4) E7(1.5,4) E8(2.5,4) E9(3.5,4) F2(-3.5,3) F3(-2.5,3) F4(-1.5,3) F5(-0.5,3) F6(0.5,3) F7(1.5,3) F8(2.5,3) F9(3.5,3) G2(-3.5,2) G3(-2.5,2) G4(-1.5,2) G5(-0.5,2) G6(0.5,2) G7(1.5,2) G8(2.5,2) G9(3.5,2) H2(-3.5,1) H3(-2.5,1) H4(-1.5,1) H5(-0.5,1) H6(0.5,1) H7(1.5,1) H8(2.5,1) H9(3.5,1) J2(-3.5,0) J3(-2.5,0) J4(-1.5,0) J5(-0.5,0) J6(0.5,0) J7(1.5,0) J8(2.5,0) J9(3.5,0) K2(-3.5,-1) K3(-2.5,-1) K4(-1.5,-1) K5(-0.5,-1) K6(0.5,-1) K7(1.5,-1) K8(2.5,-1) K9(3.5,-1) L2(-3.5,-2) L3(-2.5,-2) L4(-1.5,-2) L5(-0.5,-2) L6(0.5,-2) L7(1.5,-2) L8(2.5,-2) L9(3.5,-2) M2(-3.5,-3) M3(-2.5,-3) M4(-1.5,-3) M5(-0.5,-3) M6(0.5,-3) M7(1.5,-3) M8(2.5,-3) M9(3.5,-3) N2(-3.5,-4) N3(-2.5,-4) N4(-1.5,-4) N5(-0.5,-4) N6(0.5,-4) N7(1.5,-4) N8(2.5,-4) N9(3.5,-4) P2(-3.5,-5) P3(-2.5,-5) P4(-1.5,-5) P5(-0.5,-5) P6(0.5,-5) P7(1.5,-5) P8(2.5,-5) P9(3.5,-5) T1(-4.5,-7) T10(4.5,-7) U1(-4.5,-8) U2(-3.5,-8) U9(3.5,-8) U10(4.5,-8)
  round 0.35 on Mech9 paste+0 mask+0: A1(-4.5,8) A2(-3.5,8) A9(3.5,8) A10(4.5,8) B1(-4.5,7) B10(4.5,7) D2(-3.5,5) D3(-2.5,5) D4(-1.5,5) D5(-0.5,5) D6(0.5,5) D7(1.5,5) D8(2.5,5) D9(3.5,5) E2(-3.5,4) E3(-2.5,4) E4(-1.5,4) E5(-0.5,4) E6(0.5,4) E7(1.5,4) E8(2.5,4) E9(3.5,4) F2(-3.5,3) F3(-2.5,3) F4(-1.5,3) F5(-0.5,3) F6(0.5,3) F7(1.5,3) F8(2.5,3) F9(3.5,3) G2(-3.5,2) G3(-2.5,2) G4(-1.5,2) G5(-0.5,2) G6(0.5,2) G7(1.5,2) G8(2.5,2) G9(3.5,2) H2(-3.5,1) H3(-2.5,1) H4(-1.5,1) H5(-0.5,1) H6(0.5,1) H7(1.5,1) H8(2.5,1) H9(3.5,1) J2(-3.5,0) J3(-2.5,0) J4(-1.5,0) J5(-0.5,0) J6(0.5,0) J7(1.5,0) J8(2.5,0) J9(3.5,0) K2(-3.5,-1) K3(-2.5,-1) K4(-1.5,-1) K5(-0.5,-1) K6(0.5,-1) K7(1.5,-1) K8(2.5,-1) K9(3.5,-1) L2(-3.5,-2) L3(-2.5,-2) L4(-1.5,-2) L5(-0.5,-2) L6(0.5,-2) L7(1.5,-2) L8(2.5,-2) L9(3.5,-2) M2(-3.5,-3) M3(-2.5,-3) M4(-1.5,-3) M5(-0.5,-3) M6(0.5,-3) M7(1.5,-3) M8(2.5,-3) M9(3.5,-3) N2(-3.5,-4) N3(-2.5,-4) N4(-1.5,-4) N5(-0.5,-4) N6(0.5,-4) N7(1.5,-4) N8(2.5,-4) N9(3.5,-4) P2(-3.5,-5) P3(-2.5,-5) P4(-1.5,-5) P5(-0.5,-5) P6(0.5,-5) P7(1.5,-5) P8(2.5,-5) P9(3.5,-5) T1(-4.5,-7) T10(4.5,-7) U1(-4.5,-8) U2(-3.5,-8) U9(3.5,-8) U10(4.5,-8)
  silkscreen extent -7.77,-9 7,9, body extent -7,-9 7,9, height 1.5
CAP_C_0603x30 [mm] "Chip Capacitor, 2-Leads, Body 0.6x0.3mm, IPC Medium Density"
  rrect50% 0.275x0.3 smd mask+0.064: 1(-0.262,0) 2(0.262,0)
  body extent -0.3,-0.15 0.3,0.15, height 0.28
CAP_C_1005X60 [mm]
  rrect50% 0.65x0.6 smd mask+0.05: 1(-0.5,0) 2(0.5,0)
  silkscreen extent -0.08,-0.3 0.08,0.3, body extent -0.5,-0.26 0.5,0.27, height 0.35
CAP_C_1608X80 [mm] "Chip Capacitor, 2-Leads, Body 1.60x0.80mm, IPC Medium Density"
  rrect50% 0.85x0.95 smd: 1(-0.8,0) 2(0.8,0)
  silkscreen extent -0.9,-0.7 0.9,0.7, body extent -0.87,-0.48 0.87,0.48, height 0.85
CAP_C_2012X110 [mm] "Chip Capacitor, 2-Leads, Body 2.00x1.25mm, IPC High Density"
  rrect41% 1.2x1.3 smd: 1(-0.9,0) 2(0.9,0)
  silkscreen extent -1.1,-0.9 1.1,0.9, body extent -1.1,-0.72 1.1,0.72, height 1.1
CAP_C_3225X80 [mm] "Chip Capacitor, 2-Leads, Body 3.20x2.50mm, IPC Medium Density"
  rrect38% 1.3x2.7 smd: 1(-1.4,0) 2(1.4,0)
  silkscreen extent -0.6,-1.35 0.6,1.35, body extent -1.7,-1.35 1.7,1.35, height 0.75
CRYSTAL_ABM8G [mil]
  rect 55x47 smd: 1(-43.5,-33.5) 2(43.5,-33.5) 3(43.5,33.5) 4(-43.5,33.5)
  silkscreen extent -81,-67 81,67, body extent -63,-49 63,49, height 40
CRYSTAL_NX2012SA [mil] "Crystal NDK NX2012SA"
  rect 40x50 smd paste-1: 1(-30,0) 2(30,0)
  silkscreen extent -64,-39 64,39, body extent -40,-20 40,20, height 21
DFN-4_2.5x2 [mm] "Oscillator DSC1121"
  rrect50% 0.65x0.9 smd: 1(-0.825,-0.8) 2(0.825,-0.8) 3(0.825,0.8) 4(-0.825,0.8)
  silkscreen extent -1.5,-1.55 1.5,1.55, body extent -1.25,-1 1.25,1, height 0.86
DFN-4_2x1.6 [mm] "MEMS Oscillator"
  rrect50% 0.5x0.7 smd: 1(-0.775,-0.525) 2(0.775,-0.525) 3(0.775,0.525) 4(-0.775,0.525)
  silkscreen extent -1.33,-1.18 1.33,1.17, body extent -1,-0.8 1,0.8, height 0.86
DO-214AC_SMA [mm] "Molded Diode, 2-Leads, Body 5.20x2.61mm, IPC Medium Density"
  rrect30% 2.55x1.65 smd: 1(-2.05,0) 2(2.05,0)
  silkscreen extent -3.6,-1.5 2.8,1.5, body extent -2.6,-1.3 2.6,1.3, height 2.4
FP-RTW0024B-IPC_A [mm]
  rect 1.01x0.282 smd paste+0 mask+0: 1(-1.951,1.25)
  rrect100% 1.01x0.282 smd paste+0 mask+0: 2(-1.951,0.75) 3(-1.951,0.25) 4(-1.951,-0.25) 5(-1.951,-0.75) 6(-1.951,-1.25) 13(1.951,-1.25) 14(1.951,-0.75) 15(1.951,-0.25) 16(1.951,0.25) 17(1.951,0.75) 18(1.951,1.25)
  rrect100% 0.282x1.01 smd paste+0 mask+0: 7(-1.25,-1.951) 8(-0.75,-1.951) 9(-0.25,-1.951) 10(0.25,-1.951) 11(0.75,-1.951) 12(1.25,-1.951) 19(1.25,1.951) 20(0.75,1.951) 21(0.25,1.951) 22(-0.25,1.951) 23(-0.75,1.951) 24(-1.25,1.951)
  rect 2.55x2.55 smd paste-1000 mask+0: 25(0,0)
  silkscreen extent -3.18,-2 2,2, body extent -2.96,-2.96 2.96,2.96, height 0.25
Header_254P_8x1 [mm]
  rect 1.6x1.6 hole 1.1: 1(-8.89,0)
  round 1.6 hole 1.1: 2(-6.35,0) 3(-3.81,0) 4(-1.27,0) 5(1.27,0) 6(3.81,0) 7(6.35,0) 8(8.89,0)
  silkscreen extent -10.16,-1.27 10.16,1.27
HEX-M3_NoVia [mm]
  round 6 / inner round 4.4 / far side round 6 hole 3.18: 1(0,0)
IC_RV-3129-C3_32.768KHZ_OPTION_A_TB_QA [mm]
  rect 0.8x0.5 smd mask+0.05: 1(-1.1,1.6) 2(-1.1,0.8) 3(-1.1,0) 4(-1.1,-0.8) 5(-1.1,-1.6) 6(1.1,-1.6) 7(1.1,-0.8) 8(1.1,0) 9(1.1,0.8) 10(1.1,1.6)
  silkscreen extent -2.25,-1.85 0.38,1.85, body extent -1.25,-1.85 1.25,1.85, height 0.9
IND_C_1008 [mm]
  rect 0.9x2.4 smd mask+0.075: 1(-1,0) 2(1,0)
  silkscreen extent -0.25,-1.1 0.25,1.1, body extent -1.24,-1 1.26,1, height 1.2
L-SMD-M-3.5x3.5x2mm [mm]
  rect 1.5x1 smd: 1(0.032,-1.385) 2(0.032,1.461)
  silkscreen extent -1.73,-2.2 1.73,2.2, body extent -1.58,-1.73 1.62,1.76, height 1.84
LED_0603 [mm]
  rrect50% 0.85x0.95 smd: 1(-0.775,0) 2(0.775,0)
  silkscreen extent -1.4,-0.7 0.9,0.7, body extent -0.8,-0.4 0.8,0.4, height 0.7
MOLEX_0532610271 [mm]
  rect 0.8x1.6 smd mask+0.076: 1(-0.625,2.4) 2(0.625,2.4)
  rect 2.1x3 smd mask+0.076: M1(-3.175,-0.5) M2(3.175,-0.5)
  silkscreen extent -3.83,-2.6 3.83,4.64, body extent -3.83,-2.6 3.83,2.6, height 3.4
MOLEX_0532610471 [mm]
  rect 0.813x1.702 smd paste+0 mask+0: 1(-1.875,1.45) 2(-0.625,1.45) 3(0.625,1.45) 4(1.875,1.45)
  rect 2.21x3.099 smd paste-1.549 mask-1.549: M1(4.425,-1.45) M2(-4.425,-1.45)
  silkscreen extent -6.02,-3.68 5,1.83, body extent -5.07,-3.51 5.07,1.69, height 3.4
MOLEX_0532610571 [mm]
  rect 0.8x1.6 smd mask+0.076: 1(-2.5,2.4) 2(-1.25,2.4) 3(0,2.4) 4(1.25,2.4) 5(2.5,2.4)
  rect 2.1x3 smd mask+0.076: M1(-5.05,-0.5) M2(5.05,-0.5)
  silkscreen extent -5.7,-2.6 5.7,4.02, body extent -5.7,-2.6 5.7,2.6, height 3.2
MOLEX_0532610671 [mm]
  rect 0.8x1.6 smd: 1(-3.125,1.45) 2(-1.875,1.45) 3(-0.625,1.45) 4(0.625,1.45) 5(1.875,1.45) 6(3.125,1.45)
  rect 2.1x3 smd: M1(-5.675,-1.45) M2(5.675,-1.45)
  silkscreen extent -6.12,-3.55 6.12,2.85, body extent -6.32,-3.43 6.32,1.77, height 3.4
MOLEX_0532610971 [mm]
  rect 0.8x1.6 smd mask+0.076: 1(-5,2.4) 2(-3.75,2.4) 3(-2.5,2.4) 4(-1.25,2.4) 5(0,2.4) 6(1.25,2.4) 7(2.5,2.4) 8(3.75,2.4) 9(5,2.4)
  rect 2.1x3 smd mask+0.076: M1(-7.55,-0.5) M2(7.55,-0.5)
  silkscreen extent -8.2,-2.6 8.2,3.4, body extent -8.2,-2.6 8.2,2.6, height 3.4
MOLEX_0532611171 [mm]
  rect 0.8x1.6 smd mask+0.076: 1(-6.25,2.4) 2(-5,2.4) 3(-3.75,2.4) 4(-2.5,2.4) 5(-1.25,2.4) 6(0,2.4) 7(1.25,2.4) 8(2.5,2.4) 9(3.75,2.4) 10(5,2.4) 11(6.25,2.4)
  rect 2.1x3 smd mask+0.076: M1(-8.8,-0.5) M2(8.8,-0.5)
  silkscreen extent -9.45,-2.6 9.45,3.35, body extent -9.45,-2.6 9.45,2.6, height 3.4
Molex_1051620001 [mil]
  rect 115x22 smd: 14(-84.45,146.35) 15(80.51,146.35)
  rect 41x43 smd: G1(209.65,17.02)
  rect 41x47 smd: G2(209.65,119.78) G3(-209.64,97.33)
  rect 41x94 smd: G4(-209.65,-28.06)
  rect 20x39 smd: P1(139.76,-138.49) P2(96.46,-138.49) P3(53.15,-138.49) P4(9.84,-138.49) P5(-33.46,-138.49) P6(-76.77,-138.49) P7(-120.08,-138.49) P8(-163.39,-138.49)
  rect 28x31 smd: P9(209.06,-32.98)
  silkscreen extent -228,-169 228,154, body extent -222,-485 226,150, height 59
MOLEX_5040500891 [mm]
  rect 0.6x1 smd mask+0.076: 1(5.25,-2.87) 2(3.75,-2.87) 3(2.25,-2.87) 4(0.75,-2.87) 5(-0.75,-2.87) 6(-2.25,-2.87) 7(-3.75,-2.87) 8(-5.25,-2.87)
  rect 1.25x1.8 smd mask+0.076: M1(7.855,2.32) M2(-7.855,2.32)
  silkscreen extent -8.27,-3.7 8.27,3.22, body extent -8.27,-3.2 8.27,3.24, height 2
MOLEX_5040501191 [mm]
  rect 0.6x1 smd mask+0.076: 1(7.5,-2.87) 2(6,-2.87) 3(4.5,-2.87) 4(3,-2.87) 5(1.5,-2.87) 6(0,-2.87) 7(-1.5,-2.87) 8(-3,-2.87) 9(-4.5,-2.87) 10(-6,-2.87) 11(-7.5,-2.87)
  rect 1.25x1.8 smd mask+0.076: M1(-10.105,2.32) M2(10.105,2.32)
  silkscreen extent -10.53,-4.37 10.53,3.22, body extent -10.53,-3.2 10.53,3.24, height 2
MP_HIGHDRIVER4 [mm]
  round 1.5 hole 1 paste-2539.97 mask+0: 1(-16.51,-7.62) 2(-13.97,-7.62) 3(-11.43,-7.62) 4(-8.89,-7.62) 5(-6.35,-7.62) 6(-3.81,-7.62) 7(-1.27,-7.62) 8(1.27,-7.62) 9(3.81,-7.62) 10(6.35,-7.62) 11(8.89,-7.62) 12(11.43,-7.62) 13(13.97,-7.62) 14(16.51,-7.62) 15(16.51,7.62) 16(13.97,7.62) 17(11.43,7.62) 18(8.89,7.62) 19(6.35,7.62) 20(3.81,7.62) 21(1.27,7.62) 22(-1.27,7.62) 23(-3.81,7.62) 24(-6.35,7.62) 25(-8.89,7.62) 26(-11.43,7.62) 27(-13.97,7.62) 28(-16.51,7.62)
  silkscreen extent -19.05,-9.19 19.05,8.89, body extent -19.1,-8.93 19.1,8.93, height 6.04
PI3WVR626XEBEX_DIO [mil]
  rect 24x7 smd paste+0 mask+0: 1(-49.21,27.56) 2(-49.21,13.78) 3(-49.21,0) 4(-49.21,-13.78) 5(-49.21,-27.56) 13(49.21,-27.56) 14(49.21,-13.78) 15(49.21,0) 16(49.21,13.78) 17(49.21,27.56)
  rect 7x24 smd paste+0 mask+0: 6(-41.34,-49.21) 7(-27.56,-49.21) 8(-13.78,-49.21) 9(0,-49.21) 10(13.78,-49.21) 11(27.56,-49.21) 12(41.34,-49.21) 18(41.34,49.21) 19(27.56,49.21) 20(13.78,49.21) 21(0,49.21) 22(-13.78,49.21) 23(-27.56,49.21) 24(-41.34,49.21)
  rect 57x57 smd paste+0 mask+0: 25(0,0)
  silkscreen extent -63,-47 51,51, body extent -49,-49 49,49, height 20
PQFN50P250X300X86-14N [mm]
  rect 0.61x0.35 smd mask+0.05: 1(-1.16,0.75) 2(-1.16,0.25) 3(-1.16,-0.25) 4(-1.16,-0.75) 8(1.16,-0.75) 9(1.16,-0.25) 10(1.16,0.25) 11(1.16,0.75)
  rect 0.35x0.61 smd mask+0: 5(-0.5,-0.91) 6(0,-0.91) 7(0.5,-0.91) 12(0.5,0.91) 13(0,0.91) 14(-0.5,0.91)
  silkscreen extent -2.19,-1.3 1.55,1.3, body extent -1.5,-1.25 1.5,1.25, height 0.86
QFN18 [mm]
  rect 0.25x0.65 smd paste+0 mask+0.05: 1(-1,-1.425) 2(-0.5,-1.425) 3(0,-1.425) 4(0.5,-1.425) 5(1,-1.425) 10(1,1.425) 11(0.5,1.425) 13(-0.5,1.425) 14(-1,1.425)
  rect 0.65x0.25 smd paste+0 mask+0.05: 6(1.41,-0.75) 7(1.41,-0.25) 8(1.41,0.25) 9(1.41,0.75) 15(-1.41,0.75) 16(-1.41,0.25) 17(-1.41,-0.25) 18(-1.41,-0.75)
  rect 0.229x0.65 smd paste+0 mask+0.05: 12(0,1.425)
  rect 0.3x0.65 smd paste+0 mask+0.05: 19(-0.65,-0.475) 20(-0.65,0.475)
  rect 1x0.7 smd paste+0 mask+0: 21(0.3,-0.45) 22(0.3,0.45)
  silkscreen extent -1.72,-1.58 1.58,1.6, body extent -1.5,-1.5 1.5,1.5, height 1.04
QFN40P400X400X80-29N [mm]
  rrect50% 0.86x0.22 smd: 1(-1.935,1.2) 2(-1.935,0.8) 3(-1.935,0.4) 4(-1.935,0) 5(-1.935,-0.4) 6(-1.935,-0.8) 7(-1.935,-1.2) 15(1.935,-1.2) 16(1.935,-0.8) 17(1.935,-0.4) 18(1.935,0) 19(1.935,0.4) 20(1.935,0.8) 21(1.935,1.2)
  rrect50% 0.22x0.86 smd: 8(-1.2,-1.935) 9(-0.8,-1.935) 10(-0.4,-1.935) 11(0,-1.935) 12(0.4,-1.935) 13(0.8,-1.935) 14(1.2,-1.935) 22(1.2,1.935) 23(0.8,1.935) 24(0.4,1.935) 25(0,1.935) 26(-0.4,1.935) 27(-0.8,1.935) 28(-1.2,1.935)
  rect 2.6x2.6 smd paste-2: 29(0,0)
  silkscreen extent -2.8,-2 2,2
QFN50P300X300X80-17N [mm]
  rrect7% 0.83x0.26 smd mask+0.04: 1(-1.47,0.75) 2(-1.47,0.25) 3(-1.47,-0.25) 4(-1.47,-0.75) 9(1.47,-0.75) 10(1.47,-0.25) 11(1.47,0.25) 12(1.47,0.75)
  rrect7% 0.26x0.83 smd mask+0.04: 5(-0.75,-1.47) 6(-0.25,-1.47) 7(0.25,-1.47) 8(0.75,-1.47) 13(0.75,1.47) 14(0.25,1.47) 15(-0.25,1.47) 16(-0.75,1.47)
  rect 1.7x1.7 smd paste-2 mask+0.04: 17(0,0)
  silkscreen extent -2.6,-1.58 1.58,1.58, body extent -1.5,-1.5 1.5,1.5, height 0.8
QFN-32_5X5_EP3.7X3.7 [mm] "QFN32_5MMwith ePAD"
  rrect50% 0.7x0.3 smd mask+0.05: 1(-2.5,1.75) 2(-2.5,1.25) 3(-2.5,0.75) 4(-2.5,0.25) 5(-2.5,-0.25) 6(-2.5,-0.75) 7(-2.5,-1.25) 8(-2.5,-1.75) 17(2.5,-1.75) 18(2.5,-1.25) 19(2.5,-0.75) 20(2.5,-0.25) 21(2.5,0.25) 22(2.5,0.75) 23(2.5,1.25) 24(2.5,1.75)
  rrect50% 0.3x0.7 smd mask+0.05: 9(-1.75,-2.5) 10(-1.25,-2.5) 11(-0.75,-2.5) 12(-0.25,-2.5) 13(0.25,-2.5) 14(0.75,-2.5) 15(1.25,-2.5) 16(1.75,-2.5) 25(1.75,2.5) 26(1.25,2.5) 27(0.75,2.5) 28(0.25,2.5) 29(-0.25,2.5) 30(-0.75,2.5) 31(-1.25,2.5) 32(-1.75,2.5)
  rect 3.7x3.7 smd mask+0.05: 33(0,0)
  silkscreen extent -2.65,-2.65 2.65,2.68, body extent -2.56,-2.56 2.56,2.56, height 1.01
RES_C_1005X40 [mm]
  rrect50% 0.65x0.6 smd mask+0.05: 1(-0.5,0) 2(0.5,0)
  silkscreen extent -0.08,-0.3 0.08,0.3, body extent -0.5,-0.25 0.5,0.25, height 0.38
RES_C_1206_SHUNT [mm] "Chip Resistor, 2-Leads, Body 3.2x1.6mm, IPC Medium Density"
  rect 1x0.5 smd mask+0.1: 1(-1.5,-0.6) 1(-1.5,0.6) 2(1.5,-0.6) 2(1.5,0.6)
  rect 1x0.35 smd mask+0.1: 3(-1.5,0) 4(1.5,0)
  silkscreen extent -0.6,-0.77 0.6,0.78, body extent -1.6,-0.8 1.6,0.8, height 1
RES_C_1608X60 [mm] "Chip Resistor, 2-Leads, Body 1.63x0.83mm, IPC High Density"
  rrect50% 0.85x0.95 smd: 1(-0.8,0) 2(0.8,0)
  silkscreen extent -0.9,-0.7 0.9,0.7, body extent -0.87,-0.48 0.87,0.48, height 0.6
SOD3717X145N [mm]
  rrect22% 0.9x0.95 smd: 1(-1.68,0) 2(1.681,-0.003)
  silkscreen extent -2.4,-1.1 1.5,1.1, body extent -1.83,-0.77 1.83,0.77, height 1.5
SOIC8_150MIL_N_ISI [mil]
  rect 57.5x22 smd paste+0 mask+0: 1(-107.25,75) 2(-107.25,25) 3(-107.25,-25) 4(-107.25,-75) 5(107.25,-75) 6(107.25,-25) 7(107.25,25) 8(107.25,75)
  silkscreen extent -168,-104 84,104, body extent -122,-99 122,99, height 69
SOIC127P602X173-8N [mm]
  rrect50% 1.64x0.59 smd: 1(-2.635,1.905) 2(-2.635,0.635) 3(-2.635,-0.635) 4(-2.635,-1.905) 5(2.635,-1.905) 6(2.635,-0.635) 7(2.635,0.635) 8(2.635,1.905)
  silkscreen extent -3.5,-2.5 2,2.5, body extent -3.01,-2.57 3.01,2.57, height 1.73
SOIC127P602X173-8N_EPAD [mm]
  rrect50% 1.64x0.59 smd: 1(-2.635,1.905) 2(-2.635,0.635) 3(-2.635,-0.635) 4(-2.635,-1.905) 5(2.635,-1.905) 6(2.635,-0.635) 7(2.635,0.635) 8(2.635,1.905)
  rect 2.718x3.404 smd paste-0.159: EPAD(0,0)
  silkscreen extent -3.5,-2.5 2,2.5, body extent -3.01,-2.57 3.01,2.57, height 1.73
SOIC127P790X216-8 [mil]
  rect 58x22 smd paste+0 mask+0: 1(-144,75) 2(-144,25) 3(-144,-25) 4(-144,-75) 5(144,-75) 6(144,-25) 7(144,25) 8(144,75)
  silkscreen extent -169,-106 106,106, body extent -159,-107 159,107, height 84
SOIC_PRQ1_TEX [mil]
  rect 55.5x14 smd: 1(-116.25,89.57) 2(-116.25,63.98) 3(-116.25,38.39) 4(-116.25,12.8) 5(-116.25,-12.8) 6(-116.25,-38.39) 7(-116.25,-63.97) 8(-116.25,-89.56) 9(116.25,-89.56) 10(116.25,-63.97) 11(116.25,-38.39) 12(116.25,-12.8) 13(116.25,12.8) 14(116.25,38.39) 15(116.25,63.98) 16(116.25,89.57)
  silkscreen extent -177,-106 79,106, body extent -130,-101 130,101, height 47
SOP65P440W-24N [mm] "TSSOP-24 4.40mm Width"
  rrect50% 1.5x0.45 smd: 1(-2.9,3.575) 2(-2.9,2.925) 3(-2.9,2.275) 4(-2.9,1.625) 5(-2.9,0.975) 6(-2.9,0.325) 7(-2.9,-0.325) 8(-2.9,-0.975) 9(-2.9,-1.625) 10(-2.9,-2.275) 11(-2.9,-2.925) 12(-2.9,-3.575) 13(2.9,-3.575) 14(2.9,-2.925) 15(2.9,-2.275) 16(2.9,-1.625) 17(2.9,-0.975) 18(2.9,-0.325) 19(2.9,0.325) 20(2.9,0.975) 21(2.9,1.625) 22(2.9,2.275) 23(2.9,2.925) 24(2.9,3.575)
  silkscreen extent -3.6,-4 2.2,4, body extent -3.2,-3.9 3.2,3.9, height 1.2
SOT25 [mm]
  rrect16% 1.1x0.6 smd paste+0 mask+0: 1(-1.3,0.95) 2(-1.3,0) 3(-1.3,-0.95) 4(1.3,-0.95) 5(1.3,0.95)
  silkscreen extent -1.8,-1.6 0.9,1.6, body extent -1.43,-1.5 1.43,1.5, height 1.4
SOT95P240X120-3N [mm]
  rrect25% 1.32x0.6 smd: 1(-1,0.95) 2(-1,-0.95) 3(1,0)
  silkscreen extent -1.6,-1.5 0.7,1.5, body extent -1.3,-1.52 1.3,1.52, height 1.2